# EAGLE board charging circuit (EAGLE 9.6.2)
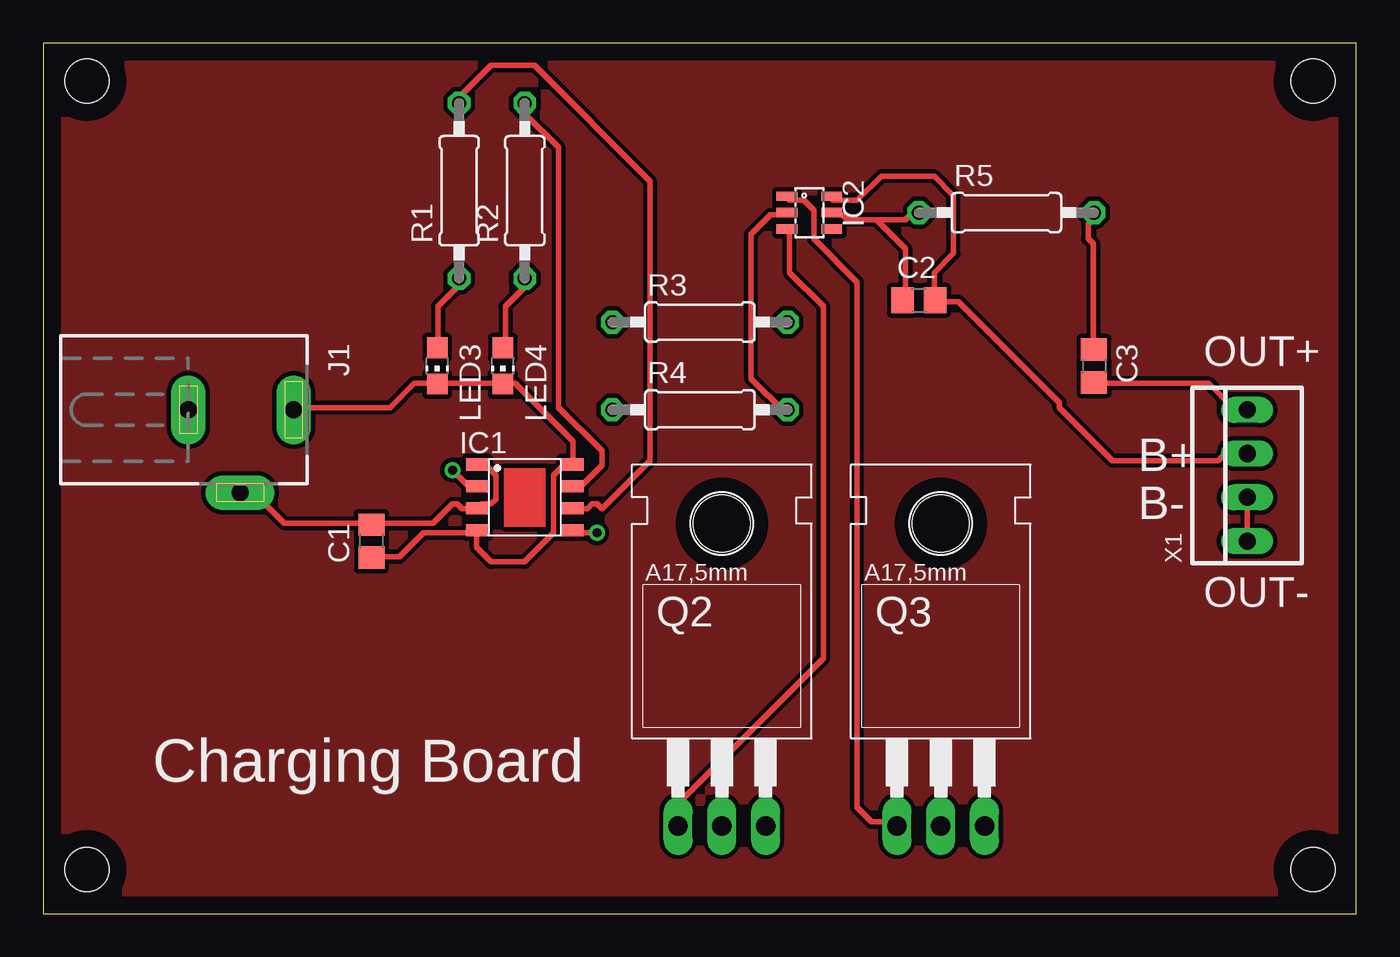
[diagram p0: board, top side]
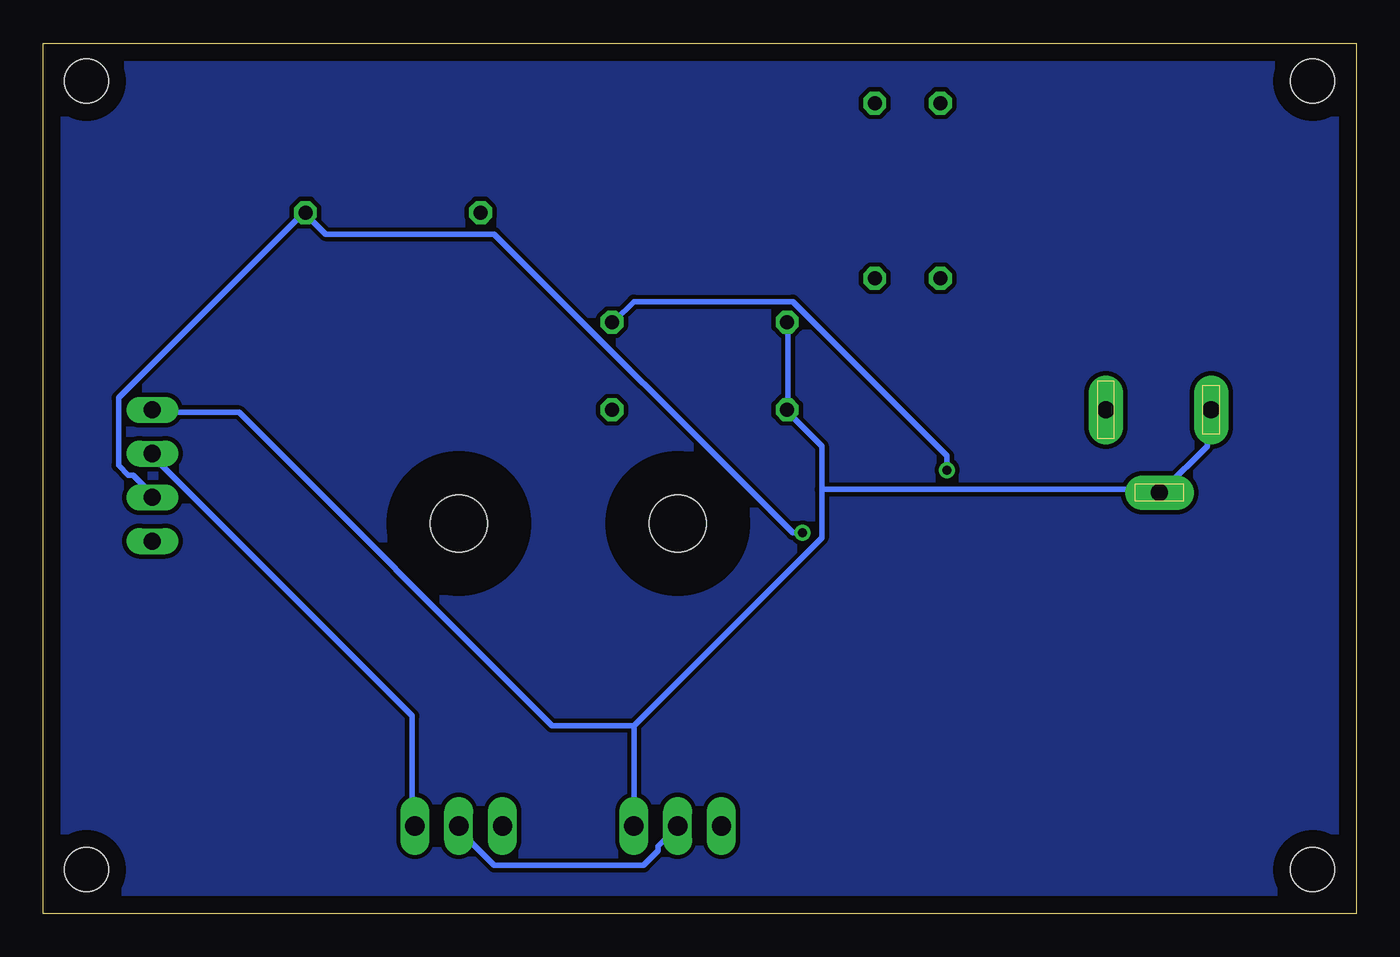
[diagram p1: board, bottom side, seen from below]

Size 76.18 x 50.47 mm. Coordinates in mm from the lower left corner, seen from the top.
Outline: 0,0 76.18,0 76.18,50.47 0,50.47 0,0
Copper layers (1*16): Top 0.035mm / dielectric 1.5mm / Bottom 0.035mm
Design rules "default": minimum track width 6mil, minimum drill 0.35mm, track to track 6mil, track to pad 6mil, pad to pad 6mil, via to via 6mil, smd to smd 6mil, copper to edge 40mil, drill to drill 6mil, minimum pad ring 10mil, minimum via ring 8mil, stop-mask expansion 4mil, vias tented up to drill 0mil, thermal gap 10mil
Net classes: 0 default: width 0.305 mm, drill 0.508 mm, clearance 0.254 mm
Holes 2.54 mm at 2.54,48.26 2.54,2.54 73.66,2.54 73.66,48.26

## Footprints (pad centres in the part's own frame; a part is rotated, then mirrored left to right if it is on the bottom)
C0805 = smd 1.3 x 1.5: 1 -0.95,0; 2 0.95,0
SOP-8 = smd 1.3 x 0.7: 1 -2.75,1.905; 2 -2.75,0.635; 3 -2.75,-0.635; 4 -2.75,-1.905; 5 2.75,-1.905; 6 2.75,-0.635; 7 2.75,0.635; 8 2.75,1.905
SOT23-6 = smd 0.55 x 1.2: 1 -0.95,-1.3; 2 0,-1.3; 3 0.95,-1.3; 4 0.95,1.3; 5 0,1.3; 6 -0.95,1.3
DCJ0202 = drill 1 pad 2 long: 1 0,3.1; 2 4.8,0; 3 0,-3
CHIP-LED0805 = smd 1.2 x 1.2: A 0,-1.05; C 0,1.05
TO220 = drill 1.118 long: 1 -2.54,-6.35; 2 0,-6.35; 3 2.54,-6.35 | hole 3.302: 0,11.176
0207/10 = drill 0.813 octagon: 1 -5.08,0; 2 5.08,0
22-23-2041 = drill 1 long: 1 -3.81,0; 2 -1.27,0; 3 1.27,0; 4 3.81,0

## Placement (x,y rotation side)
C1  0.1uF  [C0805]  19.05,21.59 90 top
C2  0.1uF  [C0805]  50.8,35.56 0 top
C3  10uF  [C0805]  60.96,31.75 270 top
IC1  TP4056  [SOP-8]  27.94,24.13 0 top
IC2  DW01A  [SOT23-6]  44.45,40.64 270 top
J1  DCJ0202  [DCJ0202]  11.43,29.21 270 top
LED3  [CHIP-LED0805]  22.86,31.75 180 top
LED4  [CHIP-LED0805]  26.67,31.75 180 top
Q2  IRF840  [TO220]  39.37,11.43 0 top
Q3  IRF840  [TO220]  52.07,11.43 0 top
R1  1K  [0207/10]  24.13,41.91 90 top
R2  1K  [0207/10]  27.94,41.91 90 top
R3  1.2K  [0207/10]  38.1,34.29 0 top
R4  1K  [0207/10]  38.1,29.21 0 top
R5  100  [0207/10]  55.88,40.64 0 top
X1  22-23-2041  [22-23-2041]  69.85,25.4 90 top

## Library data of the parts
C1-C3 = rcl; SPICEPREFIX: C
IC1 = TP4056; AVAILABILITY: Unavailable; DESCRIPTION: Complete single cell Li-Ion battery with a constant current / constant voltage linear charger; MF: NanJing Top Power ASIC Corp.; MP: TP4056; PACKAGE: Package; PRICE: None
IC2 = DW01A; AVAILABILITY: Unavailable; DESCRIPTION: One Cell Lithium-ion/Polymer Battery Protection IC; MF: Fortune Semiconductor; MP: DW01A; PACKAGE: SOT-23-6 Fortune Semiconductor; PRICE: None
J1 = con-jack; OC_FARNELL: unknown; OC_NEWARK: unknown
LED3 LED4 = led
Q2 Q3 = transistor-fet
R1-R5 = rcl; SPICEPREFIX: R
X1 = con-molex; MF: MOLEX; MPN: 22-23-2041; OC_FARNELL: 1462920; OC_NEWARK: 38C0355

## Nets
N$1: C1.1 IC1.4 IC1.8 J1.1 LED3.C LED4.C
N$2: C1.2 C3.2 IC1.1 IC1.3 J1.2 J1.3 Q2.3 R3.1 R4.1 X1.4
N$3: IC2.3 Q2.1
N$4: LED4.A R2.1
N$5: LED3.A R1.1
N$6: IC1.6 R1.2
N$7: IC1.7 R2.2
N$8: IC1.2 R3.2
N$9: C3.1 IC1.5 R5.2 X1.1 X1.2
N$10: IC2.2 R4.2
N$11: IC2.1 Q3.1
N$12: C2.2 IC2.6 Q3.3 X1.3
N$13: C2.1 IC2.5 R5.1
N$14: Q2.2 Q3.2

## Tracks (layer width: path | path; a pad name or v marks a point on that pad's centre or on a via)
GND
  pour Top: 0,50.8 0,0 76.2,0 76.2,50.8
N$1
  Top 0.305: 25.15,22.07 22.07,22.07 20.68,20.68 19.28,20.68 C1.1 | 25.15,22.07 25.15,21.23 25.98,20.4 27.94,20.4 29.62,22.07 29.62,25.43 30.45,26.26 IC1.8 30.73,26.26 30.73,27.38 27.38,30.73 26.82,30.73 LED4.C 26.54,30.73 22.91,30.73 LED3.C 22.63,30.73 21.51,30.73 20.12,29.34 14.81,29.34 J1.1 | 25.15,22.07 IC1.4
N$2
  Top 0.305: IC1.1 25.43,26.26 26.26,25.43 26.26,24.03 25.98,23.75 25.43,23.75 IC1.3 25.15,23.47 24.31,23.47 24.03,23.75 23.75,23.75 22.63,22.63 19.28,22.63 C1.2 19,22.63 13.97,22.63 12.29,24.31 11.46,24.31 J1.2 | C3.2 61.19,30.73 67.61,30.73 69.01,29.34 69.85,29.34 X1.4
  Bottom 0.305: J1.3 8.66,29.06 8.66,27.1 11.18,24.59 J1.2 11.46,24.59 31.01,24.59 | R3.1 32.97,34.09 32.97,29.34 R4.1 32.97,29.06 31.01,27.1 31.01,24.59 | 41.91,10.9 Q2.3 | 41.91,10.9 31.01,21.79 31.01,24.59 | 41.91,10.9 46.66,10.9 64.82,29.06 69.85,29.06 X1.4
N$3
  Top 0.305: IC2.3 43.31,39.67 43.31,37.16 45.26,35.2 45.26,14.81 36.88,6.43 36.88,5.31 Q2.1
N$4
  Top 0.305: R2.1 27.94,36.32 26.82,35.2 26.82,32.97 LED4.A
N$5
  Top 0.305: LED3.A 22.91,32.97 22.91,35.2 24.31,36.6 R1.1
N$6
  Top 0.305: IC1.6 30.73,23.47 31.57,23.47 31.85,23.75 32.13,23.75 32.41,23.47 35.2,26.26 35.2,42.47 28.5,49.17 25.98,49.17 24.03,47.22 R1.2
N$7
  Top 0.305: R2.2 27.94,46.38 29.9,44.42 29.9,29.34 32.41,26.82 32.41,25.98 31.29,24.87 30.73,24.87 IC1.7
N$8  (via drill 0.51)
  Top 0.305: v23.75,25.7 24.59,24.87 25.15,24.87 IC1.2
  Bottom 0.305: v23.75,25.7 23.75,26.54 32.69,35.48 41.91,35.48 43.03,34.37 R3.2
N$9  (via drill 0.51)
  Top 0.305: X1.2 X1.1 | v32.13,22.07 30.73,22.07 IC1.5 | C3.1 60.91,32.97 60.91,38.84 60.63,39.12 60.63,39.95 61.19,40.51 R5.2
  Bottom 0.305: v32.13,22.07 32.69,22.07 50.01,39.4 59.79,39.4 60.91,40.51 R5.2 61.19,40.51 71.81,29.9 71.81,25.98 71.25,25.43 70.97,25.43 69.85,24.31 X1.2
N$10
  Top 0.305: IC2.2 43.03,40.51 42.19,40.51 41.07,39.4 41.07,31.01 43.03,29.06 R4.2
N$11
  Top 0.305: IC2.1 43.31,41.35 44.15,41.35 44.7,40.79 44.7,39.12 47.22,36.6 47.22,6.15 48.06,5.31 49.45,5.31 Q3.1
N$12
  Top 0.305: IC2.6 45.82,41.35 47.22,41.35 48.62,42.75 51.69,42.75 52.81,41.63 52.81,38.28 51.69,37.16 51.69,35.76 C2.2 51.97,35.48 53.09,35.48 58.95,29.62 58.95,29.34 62.03,26.26 68.17,26.26 68.45,26.54 69.85,26.54 X1.3
  Bottom 0.305: X1.3 69.85,26.54 54.76,11.46 54.76,5.31 Q3.3
N$13
  Top 0.305: 48.34,40.23 50.01,40.23 50.57,40.79 R5.1 | 48.34,40.23 46.66,40.23 46.38,40.51 45.82,40.51 IC2.5 | 48.34,40.23 50.01,38.56 50.01,35.76 C2.1
N$14
  Bottom 0.305: Q2.2 39.4,5.03 40.51,3.91 40.51,3.63 41.35,2.79 50.01,2.79 52.25,5.03 Q3.2
VCC
  pour Bottom: 0,50.8 0,0 76.2,0 76.2,50.8

## Text on the board
tPlace: OUT+ | B+ / B- | OUT- | Charging Board